# Altium PCB isg_AL11b_equip_chip_board_passive.PcbDoc
Units mil, origin at the board's own origin, x right, y up, seen from the top; angles counter-clockwise.
Board outline 6000 x 4000 mil, 2 copper layers (Top Layer, Bottom Layer); 1 components, 265 nets, 361 pads, 0 vias.
Unrouted connection lines stored in the file: 96.
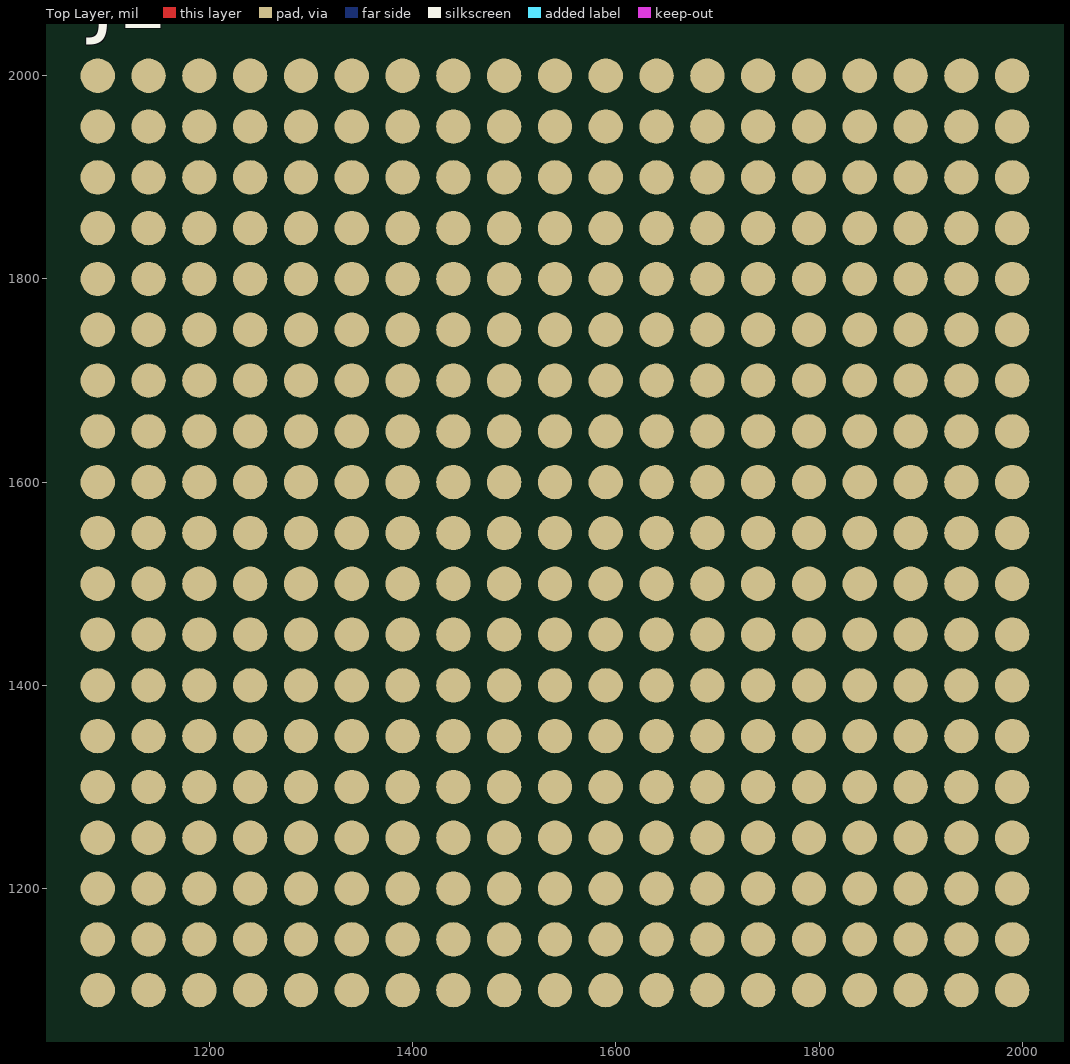
[diagram p0: Top Layer view]
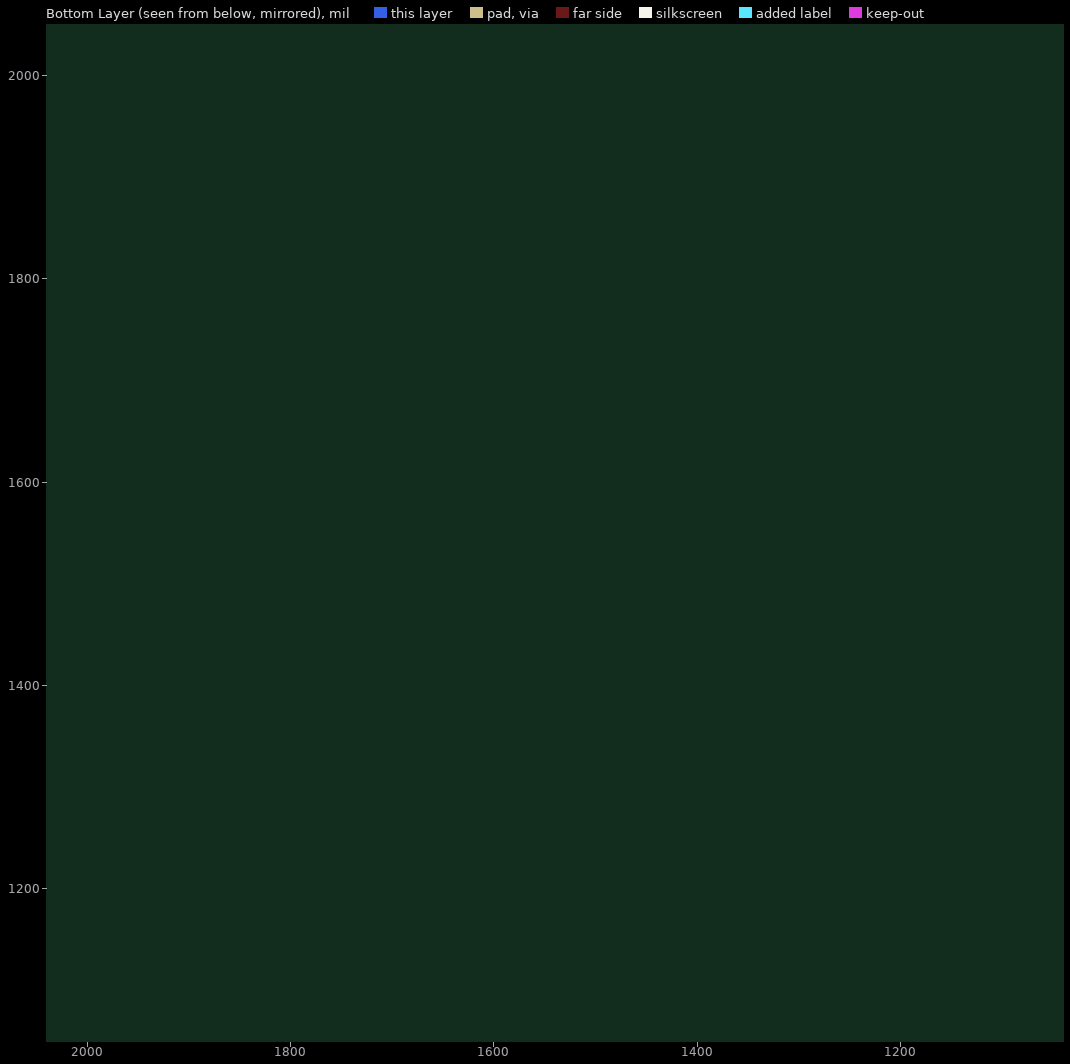
[diagram p1: Bottom Layer view, seen from below]

## Layer stack, top to bottom
Top Solder: solder mask 0.4, Solder Resist, Dk 3.5
Top Layer: signal copper 1.4
Dielectric 1: dielectric 12.6, FR-4, Dk 4.8
Bottom Layer: signal copper 1.4
Bottom Solder: solder mask 0.4, Solder Resist, Dk 3.5

## Board outline
1000,1000 7000,1000 7000,5000 1000,5000

## Design rules (kind name [scope] priority, off if disabled: settings)
Clearance [All] p1: gap=10 ignorepadtopadclearanceinfootprint=FALSE except(0: Arc-Hole Track-Hole SMDPad-Hole THPad-Hole Via-Hole Fill-Hole Poly-Hole Region-Hole Text-Hole)
PolygonConnect [All] p1: connectstyle=Relief reliefconductorwidth=10 reliefentries=4 polygonreliefangle="90 Angle" airgapwidth=10
RoutingVias [All] p1: holewidth=28 width=50 viastyle="Through Hole" minholewidth=28 minwidth=50 maxholewidth=28 maxwidth=50
SolderMaskExpansion [All] p1: expansion=4 istentingtop=FALSE
Width [All] p1: maxlimit=10 minlimit=10 preferedwidth=10
30 further rules are at their usual default settings.

## Components (designator, comment, footprint, x,y, rotation, side; value= is the part's Value field where it differs from the comment)
J1 "BGA" BGA361x19_CHIP_BOARD_TOP 1090,2000 r0 top

## Footprints (in the part's own frame and the unit in brackets; to place one, negate y for a bottom-side part, rotate by r counter-clockwise, add the part's x,y. Pads: shape width x height; smd on the part's side, far side on the other; paste and mask are expansions set on the pad)
BGA361x19_CHIP_BOARD_TOP [mm]
  round 0.86 smd mask-0.05: A1(22.86,0) A2(21.59,0) A3(20.32,0) A4(19.05,0) A5(17.78,0) A6(16.51,0) A7(15.24,0) A8(13.97,0) A9(12.7,0) A10(11.43,0) A11(10.16,0) A12(8.89,0) A13(7.62,0) A14(6.35,0) A15(5.08,0) A16(3.81,0) A17(2.54,0) A18(1.27,0) A19(0,0) B1(22.86,-1.27) B2(21.59,-1.27) B3(20.32,-1.27) B4(19.05,-1.27) B5(17.78,-1.27) B6(16.51,-1.27) B7(15.24,-1.27) B8(13.97,-1.27) B9(12.7,-1.27) B10(11.43,-1.27) B11(10.16,-1.27) B12(8.89,-1.27) B13(7.62,-1.27) B14(6.35,-1.27) B15(5.08,-1.27) B16(3.81,-1.27) B17(2.54,-1.27) B18(1.27,-1.27) B19(0,-1.27) C1(22.86,-2.54) C2(21.59,-2.54) C3(20.32,-2.54) C4(19.05,-2.54) C5(17.78,-2.54) C6(16.51,-2.54) C7(15.24,-2.54) C8(13.97,-2.54) C9(12.7,-2.54) C10(11.43,-2.54) C11(10.16,-2.54) C12(8.89,-2.54) C13(7.62,-2.54) C14(6.35,-2.54) C15(5.08,-2.54) C16(3.81,-2.54) C17(2.54,-2.54) C18(1.27,-2.54) C19(0,-2.54) D1(22.86,-3.81) D2(21.59,-3.81) D3(20.32,-3.81) D4(19.05,-3.81) D5(17.78,-3.81) D6(16.51,-3.81) D7(15.24,-3.81) D8(13.97,-3.81) D9(12.7,-3.81) D10(11.43,-3.81) D11(10.16,-3.81) D12(8.89,-3.81) D13(7.62,-3.81) D14(6.35,-3.81) D15(5.08,-3.81) D16(3.81,-3.81) D17(2.54,-3.81) D18(1.27,-3.81) D19(0,-3.81) E1(22.86,-5.08) E2(21.59,-5.08) E3(20.32,-5.08) E4(19.05,-5.08) E5(17.78,-5.08) E6(16.51,-5.08) E7(15.24,-5.08) E8(13.97,-5.08) E9(12.7,-5.08) E10(11.43,-5.08) E11(10.16,-5.08) E12(8.89,-5.08) E13(7.62,-5.08) E14(6.35,-5.08) E15(5.08,-5.08) E16(3.81,-5.08) E17(2.54,-5.08) E18(1.27,-5.08) E19(0,-5.08) F1(22.86,-6.35) F2(21.59,-6.35) F3(20.32,-6.35) F4(19.05,-6.35) F5(17.78,-6.35) F6(16.51,-6.35) F7(15.24,-6.35) F8(13.97,-6.35) F9(12.7,-6.35) F10(11.43,-6.35) F11(10.16,-6.35) F12(8.89,-6.35) F13(7.62,-6.35) F14(6.35,-6.35) F15(5.08,-6.35) F16(3.81,-6.35) F17(2.54,-6.35) F18(1.27,-6.35) F19(0,-6.35) G1(22.86,-7.62) G2(21.59,-7.62) G3(20.32,-7.62) G4(19.05,-7.62) G5(17.78,-7.62) G6(16.51,-7.62) G7(15.24,-7.62) G8(13.97,-7.62) G9(12.7,-7.62) G10(11.43,-7.62) G11(10.16,-7.62) G12(8.89,-7.62) G13(7.62,-7.62) G14(6.35,-7.62) G15(5.08,-7.62) G16(3.81,-7.62) G17(2.54,-7.62) G18(1.27,-7.62) G19(0,-7.62) H1(22.86,-8.89) H2(21.59,-8.89) H3(20.32,-8.89) H4(19.05,-8.89) H5(17.78,-8.89) H6(16.51,-8.89) H7(15.24,-8.89) H8(13.97,-8.89) H9(12.7,-8.89) H10(11.43,-8.89) H11(10.16,-8.89) H12(8.89,-8.89) H13(7.62,-8.89) H14(6.35,-8.89) H15(5.08,-8.89) H16(3.81,-8.89) H17(2.54,-8.89) H18(1.27,-8.89) H19(0,-8.89) J1(22.86,-10.16) J2(21.59,-10.16) J3(20.32,-10.16) J4(19.05,-10.16) J5(17.78,-10.16) J6(16.51,-10.16) J7(15.24,-10.16) J8(13.97,-10.16) J9(12.7,-10.16) J10(11.43,-10.16) J11(10.16,-10.16) J12(8.89,-10.16) J13(7.62,-10.16) J14(6.35,-10.16) J15(5.08,-10.16) J16(3.81,-10.16) J17(2.54,-10.16) J18(1.27,-10.16) J19(0,-10.16) K1(22.86,-11.43) K2(21.59,-11.43) K3(20.32,-11.43) K4(19.05,-11.43) K5(17.78,-11.43) K6(16.51,-11.43) K7(15.24,-11.43) K8(13.97,-11.43) K9(12.7,-11.43) K10(11.43,-11.43) K11(10.16,-11.43) K12(8.89,-11.43) K13(7.62,-11.43) K14(6.35,-11.43) K15(5.08,-11.43) K16(3.81,-11.43) K17(2.54,-11.43) K18(1.27,-11.43) K19(0,-11.43) L1(22.86,-12.7) L2(21.59,-12.7) L3(20.32,-12.7) L4(19.05,-12.7) L5(17.78,-12.7) L6(16.51,-12.7) L7(15.24,-12.7) L8(13.97,-12.7) L9(12.7,-12.7) L10(11.43,-12.7) L11(10.16,-12.7) L12(8.89,-12.7) L13(7.62,-12.7) L14(6.35,-12.7) L15(5.08,-12.7) L16(3.81,-12.7) L17(2.54,-12.7) L18(1.27,-12.7) L19(0,-12.7) M1(22.86,-13.97) M2(21.59,-13.97) M3(20.32,-13.97) M4(19.05,-13.97) M5(17.78,-13.97) M6(16.51,-13.97) M7(15.24,-13.97) M8(13.97,-13.97) M9(12.7,-13.97) M10(11.43,-13.97) M11(10.16,-13.97) M12(8.89,-13.97) M13(7.62,-13.97) M14(6.35,-13.97) M15(5.08,-13.97) M16(3.81,-13.97) M17(2.54,-13.97) M18(1.27,-13.97) M19(0,-13.97) N1(22.86,-15.24) N2(21.59,-15.24) N3(20.32,-15.24) N4(19.05,-15.24) N5(17.78,-15.24) N6(16.51,-15.24) N7(15.24,-15.24) N8(13.97,-15.24) N9(12.7,-15.24) N10(11.43,-15.24) N11(10.16,-15.24) N12(8.89,-15.24) N13(7.62,-15.24) N14(6.35,-15.24) N15(5.08,-15.24) N16(3.81,-15.24) N17(2.54,-15.24) N18(1.27,-15.24) N19(0,-15.24) P1(22.86,-16.51) P2(21.59,-16.51) P3(20.32,-16.51) P4(19.05,-16.51) P5(17.78,-16.51) P6(16.51,-16.51) P7(15.24,-16.51) P8(13.97,-16.51) P9(12.7,-16.51) P10(11.43,-16.51) P11(10.16,-16.51) P12(8.89,-16.51) P13(7.62,-16.51) P14(6.35,-16.51) P15(5.08,-16.51) P16(3.81,-16.51) P17(2.54,-16.51) P18(1.27,-16.51) P19(0,-16.51) R1(22.86,-17.78) R2(21.59,-17.78) R3(20.32,-17.78) R4(19.05,-17.78) R5(17.78,-17.78) R6(16.51,-17.78) R7(15.24,-17.78) R8(13.97,-17.78) R9(12.7,-17.78) R10(11.43,-17.78) R11(10.16,-17.78) R12(8.89,-17.78) R13(7.62,-17.78) R14(6.35,-17.78) R15(5.08,-17.78) R16(3.81,-17.78) R17(2.54,-17.78) R18(1.27,-17.78) R19(0,-17.78) T1(22.86,-19.05) T2(21.59,-19.05) T3(20.32,-19.05) T4(19.05,-19.05) T5(17.78,-19.05) T6(16.51,-19.05) T7(15.24,-19.05) T8(13.97,-19.05) T9(12.7,-19.05) T10(11.43,-19.05) T11(10.16,-19.05) T12(8.89,-19.05) T13(7.62,-19.05) T14(6.35,-19.05) T15(5.08,-19.05) T16(3.81,-19.05) T17(2.54,-19.05) T18(1.27,-19.05) T19(0,-19.05) U1(22.86,-20.32) U2(21.59,-20.32) U3(20.32,-20.32) U4(19.05,-20.32) U5(17.78,-20.32) U6(16.51,-20.32) U7(15.24,-20.32) U8(13.97,-20.32) U9(12.7,-20.32) U10(11.43,-20.32) U11(10.16,-20.32) U12(8.89,-20.32) U13(7.62,-20.32) U14(6.35,-20.32) U15(5.08,-20.32) U16(3.81,-20.32) U17(2.54,-20.32) U18(1.27,-20.32) U19(0,-20.32) V1(22.86,-21.59) V2(21.59,-21.59) V3(20.32,-21.59) V4(19.05,-21.59) V5(17.78,-21.59) V6(16.51,-21.59) V7(15.24,-21.59) V8(13.97,-21.59) V9(12.7,-21.59) V10(11.43,-21.59) V11(10.16,-21.59) V12(8.89,-21.59) V13(7.62,-21.59) V14(6.35,-21.59) V15(5.08,-21.59) V16(3.81,-21.59) V17(2.54,-21.59) V18(1.27,-21.59) V19(0,-21.59) W1(22.86,-22.86) W2(21.59,-22.86) W3(20.32,-22.86) W4(19.05,-22.86) W5(17.78,-22.86) W6(16.51,-22.86) W7(15.24,-22.86) W8(13.97,-22.86) W9(12.7,-22.86) W10(11.43,-22.86) W11(10.16,-22.86) W12(8.89,-22.86) W13(7.62,-22.86) W14(6.35,-22.86) W15(5.08,-22.86) W16(3.81,-22.86) W17(2.54,-22.86) W18(1.27,-22.86) W19(0,-22.86)

## Nets (pads, with @x,y where several pads share a name; then routed paths per layer and width w, separated by ;. In a path a pad name is that pad's centre, name@x,y a point inside that pad or via, vN(x,y) a via of type N, cw(c..) or ccw(c..) an arc to the next point about the centre after c; other vN are vias at no path point)
AVDD: J1.G6 J1.G8 J1.G10 J1.G12 J1.G13 J1.H9 J1.H11 J1.H13 J1.J8 J1.J10 J1.J12
AVDD2: J1.F11 J1.G11
BL__cml_out_1: J1.E15
BL__cml_out_2: J1.E14
BL__hs_clk_n: J1.D14
BL__hs_clk_p: J1.D15
BL__mri_rf_lo_n: J1.E16
BL__mri_rf_lo_p: J1.F16
DVDD: J1.K10 J1.K12 J1.L11 J1.M10 J1.M12 J1.N11
eos34_hs_clk_n: J1.T9
eos34_hs_clk_p: J1.T8
eos34_sigIn_0: J1.T7
eos34_sigIn_1: J1.T6
eos34_sigIn_2: J1.T5
eos34_sigIn_3: J1.T4
eos34_sigIn_4: J1.R4
eos34_sigIn_5: J1.P4
eos34_sigIn_6: J1.N4
eos34_sigIn_7: J1.T16
eos34_sigIn_8: J1.T15
eos34_sigIn_9: J1.T14
eos34_sigIn_10: J1.T10
eos34_sigIn_11: J1.T13
eos34_sigIn_12: J1.T12
eos34_sigIn_13: J1.T11
equip__PulseCurver_Anode_v_E5: J1.M18
equip__PulseCurver_Anode_v_E12: J1.L18
equip__PulseCurver_Anode_v_E20: J1.J19
equip__PulseCurver_Anode_v_E26: J1.K19
equip__PulseCurver_Anode_v_E30: J1.H19
equip__PulseCurver_Cathode_v_E5: J1.M19
equip__PulseCurver_Cathode_v_E12: J1.L19
equip__PulseCurver_Cathode_v_E20: J1.J18
equip__PulseCurver_Cathode_v_E26: J1.K18
equip__PulseCurver_Cathode_v_E30: J1.H18
fpa__hs_clk_n: J1.H16
fpa__hs_clk_p: J1.J16
HVDD: J1.H14 J1.J13 J1.J15 J1.K14 J1.L13 J1.L15 J1.M14 J1.N13 J1.N15
sig_A1: J1.A1
sig_A2: J1.A2
sig_A3: J1.A3
sig_A4: J1.A4
sig_A5: J1.A5
sig_A6: J1.A6
sig_A7: J1.A7
sig_A8: J1.A8
sig_A9: J1.A9
sig_A10: J1.A10
sig_A11: J1.A11
sig_A12: J1.A12
sig_A13: J1.A13
sig_A14: J1.A14
sig_A15: J1.A15
sig_A16: J1.A16
sig_A17: J1.A17
sig_A18: J1.A18
sig_A19: J1.A19
sig_B1: J1.B1
sig_B2: J1.B2
sig_B3: J1.B3
sig_B4: J1.B4
sig_B5: J1.B5
sig_B6: J1.B6
sig_B7: J1.B7
sig_B8: J1.B8
sig_B9: J1.B9
sig_B10: J1.B10
sig_B11: J1.B11
sig_B12: J1.B12
sig_B13: J1.B13
sig_B14: J1.B14
sig_B15: J1.B15
sig_B16: J1.B16
sig_B17: J1.B17
sig_B18: J1.B18
sig_B19: J1.B19
sig_C1: J1.C1
sig_C2: J1.C2
sig_C3: J1.C3
sig_C4: J1.C4
sig_C5: J1.C5
sig_C6: J1.C6
sig_C7: J1.C7
sig_C8: J1.C8
sig_C9: J1.C9
sig_C10: J1.C10
sig_C11: J1.C11
sig_C12: J1.C12
sig_C13: J1.C13
sig_C14: J1.C14
sig_C15: J1.C15
sig_C16: J1.C16
sig_C17: J1.C17
sig_C18: J1.C18
sig_C19: J1.C19
sig_D1: J1.D1
sig_D2: J1.D2
sig_D3: J1.D3
sig_D17: J1.D17
sig_D18: J1.D18
sig_D19: J1.D19
sig_E1: J1.E1
sig_E2: J1.E2
sig_E3: J1.E3
sig_E17: J1.E17
sig_E18: J1.E18
sig_E19: J1.E19
sig_F1: J1.F1
sig_F2: J1.F2
sig_F3: J1.F3
sig_F17: J1.F17
sig_F18: J1.F18
sig_F19: J1.F19
sig_G1: J1.G1
sig_G2: J1.G2
sig_G3: J1.G3
sig_G17: J1.G17
sig_G18: J1.G18
sig_G19: J1.G19
sig_H1: J1.H1
sig_H2: J1.H2
sig_H3: J1.H3
sig_H17: J1.H17
sig_J1: J1.J1
sig_J2: J1.J2
sig_J3: J1.J3
sig_J17: J1.J17
sig_K1: J1.K1
sig_K2: J1.K2
sig_K3: J1.K3
sig_K17: J1.K17
sig_L1: J1.L1
sig_L2: J1.L2
sig_L3: J1.L3
sig_L16: J1.L16
sig_L17: J1.L17
sig_M1: J1.M1
sig_M2: J1.M2
sig_M3: J1.M3
sig_M16: J1.M16
sig_M17: J1.M17
sig_N1: J1.N1
sig_N2: J1.N2
sig_N3: J1.N3
sig_N16: J1.N16
sig_N17: J1.N17
sig_N18: J1.N18
sig_N19: J1.N19
sig_P1: J1.P1
sig_P2: J1.P2
sig_P3: J1.P3
sig_P16: J1.P16
sig_P17: J1.P17
sig_P18: J1.P18
sig_P19: J1.P19
sig_R1: J1.R1
sig_R2: J1.R2
sig_R3: J1.R3
sig_R15: J1.R15
sig_R16: J1.R16
sig_R17: J1.R17
sig_R18: J1.R18
sig_R19: J1.R19
sig_T1: J1.T1
sig_T2: J1.T2
sig_T3: J1.T3
sig_T17: J1.T17
sig_T18: J1.T18
sig_T19: J1.T19
sig_U1: J1.U1
sig_U2: J1.U2
sig_U3: J1.U3
sig_U4: J1.U4
sig_U5: J1.U5
sig_U6: J1.U6
sig_U7: J1.U7
sig_U8: J1.U8
sig_U9: J1.U9
sig_U10: J1.U10
sig_U11: J1.U11
sig_U12: J1.U12
sig_U13: J1.U13
sig_U14: J1.U14
sig_U15: J1.U15
sig_U16: J1.U16
sig_U17: J1.U17
sig_U18: J1.U18
sig_U19: J1.U19
sig_V1: J1.V1
sig_V2: J1.V2
sig_V3: J1.V3
sig_V4: J1.V4
sig_V5: J1.V5
sig_V6: J1.V6
sig_V7: J1.V7
sig_V8: J1.V8
sig_V9: J1.V9
sig_V10: J1.V10
sig_V11: J1.V11
sig_V12: J1.V12
sig_V13: J1.V13
sig_V14: J1.V14
sig_V15: J1.V15
sig_V16: J1.V16
sig_V17: J1.V17
sig_V18: J1.V18
sig_V19: J1.V19
sig_W1: J1.W1
sig_W2: J1.W2
sig_W3: J1.W3
sig_W4: J1.W4
sig_W5: J1.W5
sig_W6: J1.W6
sig_W7: J1.W7
sig_W8: J1.W8
sig_W9: J1.W9
sig_W10: J1.W10
sig_W11: J1.W11
sig_W12: J1.W12
sig_W13: J1.W13
sig_W14: J1.W14
sig_W15: J1.W15
sig_W16: J1.W16
sig_W17: J1.W17
sig_W18: J1.W18
sig_W19: J1.W19
TXVDD: J1.F12 J1.F13
us__CML_clk_n: J1.D6
us__CML_clk_p: J1.D5
us__rx_out_0_n: J1.D4
us__rx_out_0_p: J1.E4
us__rx_out_1_n: J1.E12
us__rx_out_1_p: J1.E11
us__rx_out_2_n: J1.D12
us__rx_out_2_p: J1.D11
us__rx_out_3_n: J1.M5
us__rx_out_3_p: J1.M4
us__rx_out_4_n: J1.K4
us__rx_out_4_p: J1.L4
us__rx_out_5_n: J1.D10
us__rx_out_5_p: J1.D9
us__rx_out_6_n: J1.D8
us__rx_out_6_p: J1.D7
us__rx_out_7_n: J1.K5
us__rx_out_7_p: J1.L5
us__rx_out_8_n: J1.J5
us__rx_out_8_p: J1.H5
us__rx_out_9_n: J1.E8
us__rx_out_9_p: J1.E7
us__rx_out_10_n: J1.E9
us__rx_out_10_p: J1.E10
us__rx_out_11_n: J1.G5
us__rx_out_11_p: J1.F5
us__rx_out_12_n: J1.G4
us__rx_out_12_p: J1.F4
us__rx_out_13_n: J1.E5
us__rx_out_13_p: J1.E6
us__rx_out_14_n: J1.J4
us__rx_out_14_p: J1.H4
VDD: J1.H7 J1.J6 J1.K7 J1.K8 J1.L6 J1.L8 J1.M7 J1.N6 J1.N8 J1.P7
VPD: J1.F10
VREF0: J1.F9
VREF1: J1.F8
VREF2: J1.F7
VSS: J1.D13 J1.D16 J1.E13 J1.F6 J1.F14 J1.F15 J1.G7 J1.G9 J1.G14 J1.G15 J1.G16 J1.H6 J1.H8 J1.H10 J1.H12 J1.H15 J1.J7 J1.J9 J1.J11 J1.J14 J1.K6 J1.K9 J1.K11 J1.K13 J1.K15 J1.K16 J1.L7 J1.L9 J1.L10 J1.L12 J1.L14 J1.M6 J1.M8 J1.M9 J1.M11 J1.M13 J1.M15 J1.N5 J1.N7 J1.N9 J1.N10 J1.N12 J1.N14 J1.P5 J1.P6 J1.P8 J1.P9 J1.P10 J1.P11 J1.P12 J1.P13 J1.P14 J1.P15 J1.R5 J1.R6 J1.R7 J1.R8 J1.R9 J1.R10 J1.R11 J1.R12 J1.R13 J1.R14